# Altium PCB Адаптер_USB-DMX512.PcbDoc
Units mm, origin at the board's own origin, x right, y up, seen from the top; angles counter-clockwise.
Board outline 45 x 23 mm, 2 copper layers (Top Layer, Bottom Layer), stack 1.47 mm thick; 16 components, 16 nets, 75 pads, 9 vias.
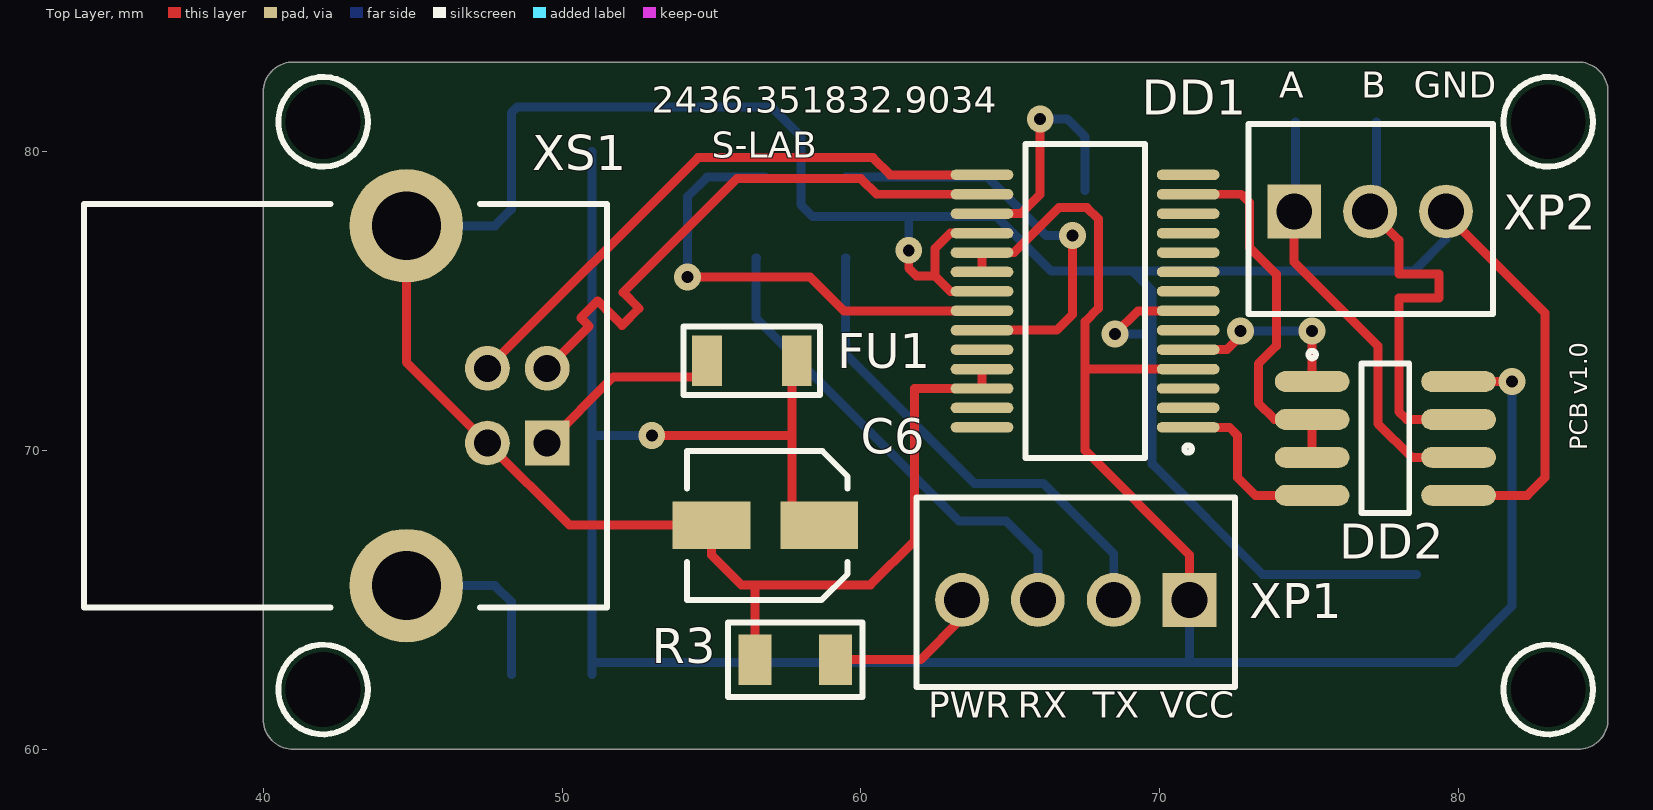
[diagram p0: Top Layer view]
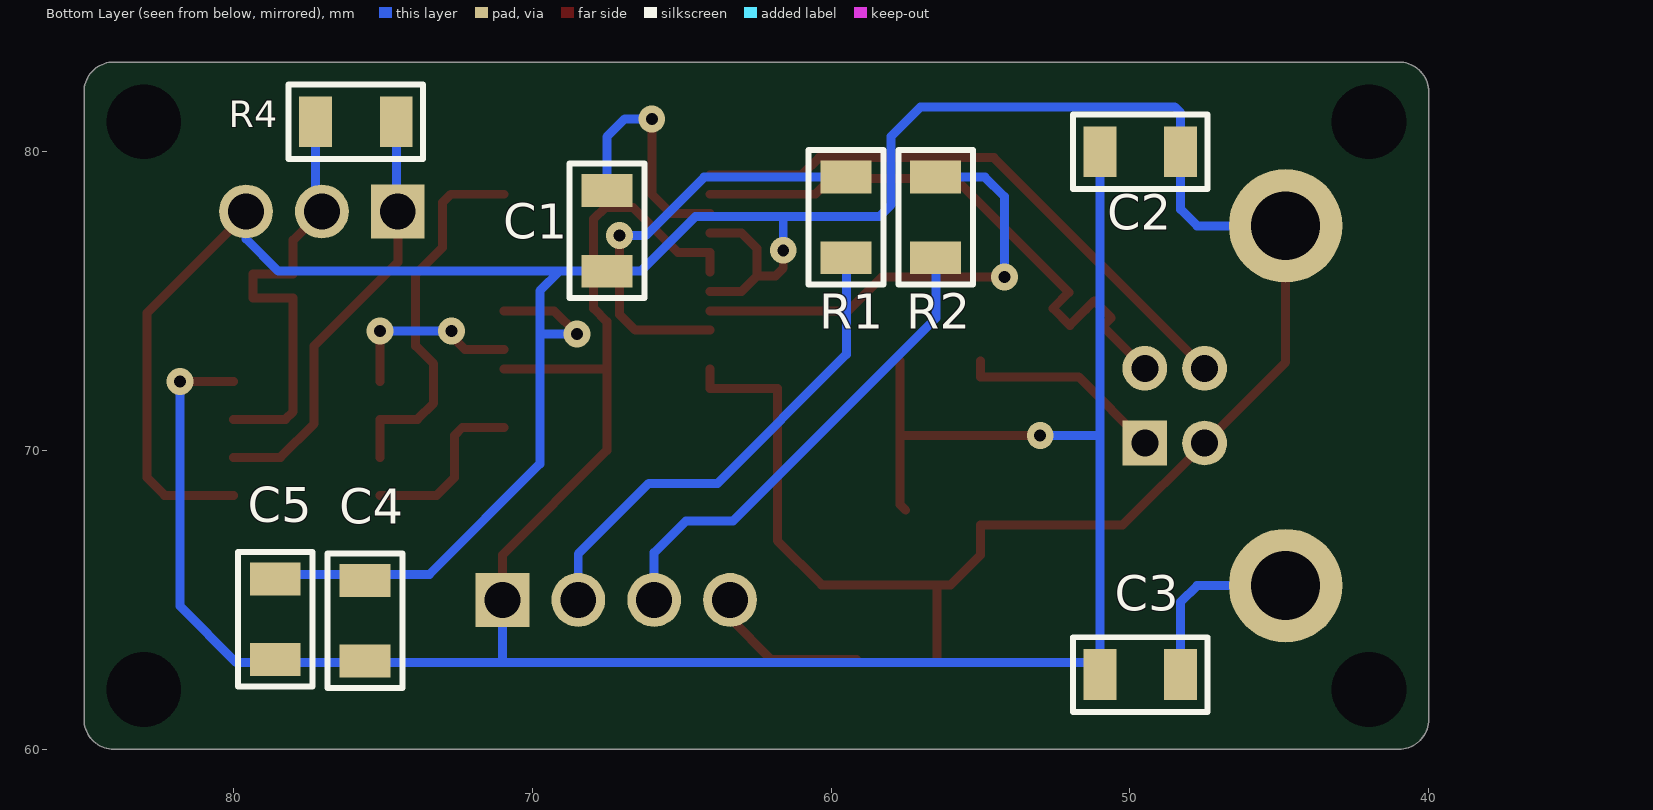
[diagram p1: Bottom Layer view, seen from below]
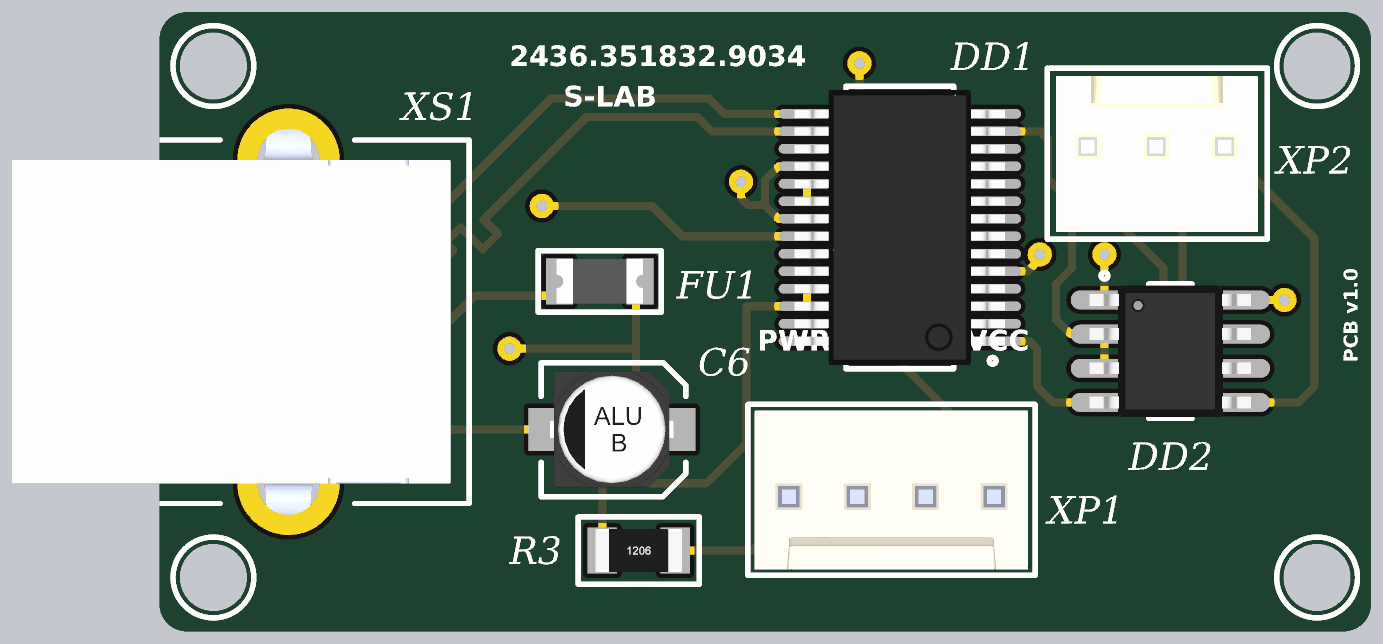
[diagram p2: 3D render of the assembled board from above, using the file's embedded part models]
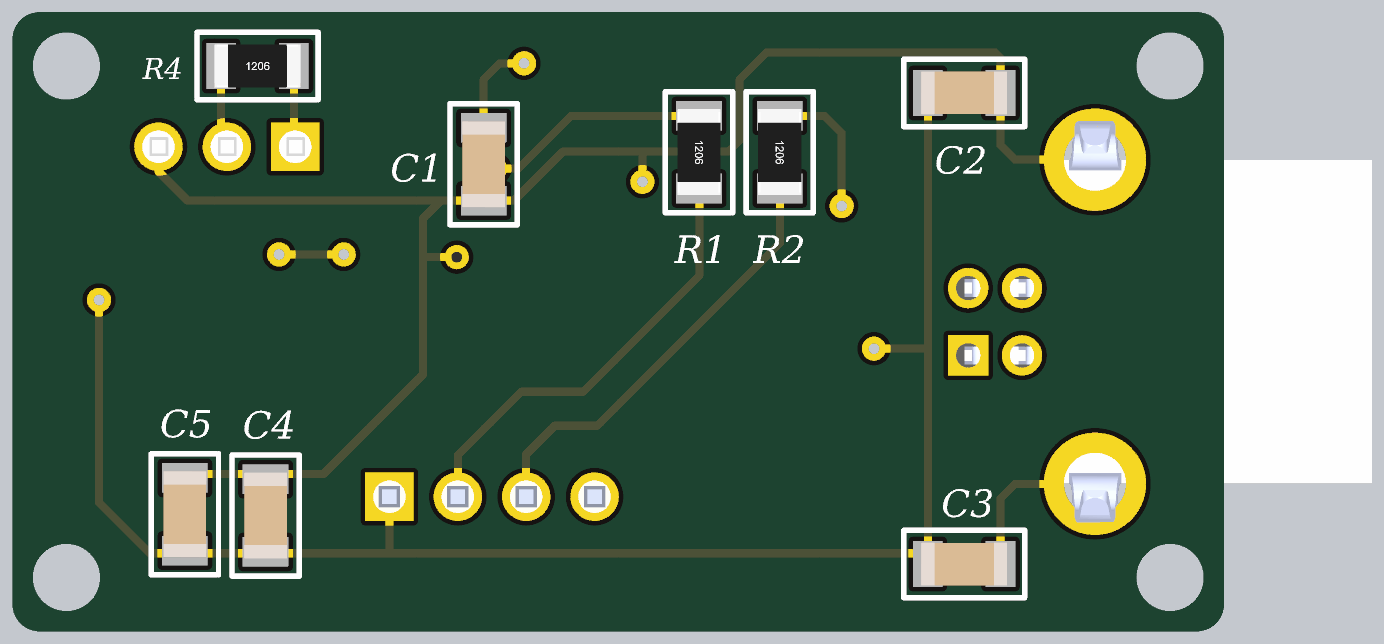
[diagram p3: 3D render of the assembled board from below, using the file's embedded part models]

## Layer stack, top to bottom
Top Solder: solder mask 0.015, Solder Resist, Dk 3.5
Top Layer: signal copper 0.035
Dielectric1: dielectric 1.4, FR-4, Dk 4.8
Bottom Layer: signal copper 0.035
Bottom Solder: solder mask 0.015, Solder Resist, Dk 3.5

## Board outline
40,61 40,82 cw(c41,82) 41,83 84,83 cw(c84,82) 85,82 85,61 cw(c84,61) 84,60 41,60 cw(c41,61)

## Design rules (kind name [scope] priority, off if disabled: settings)
AssemblyTestPointUsage [All] p1 off:
AssemblyTestpoint [All] p1 off: testpointundercomponent=TRUE minsize=1.016 maxsize=2.54 preferedsize=1.524 minholesize=0 maxholesize=1.016 preferedholesize=0.813 testpointgrid=0.025 usegrid=TRUE gridtolerance=0 allowsidetop=TRUE allowsidebottom=TRUE
Clearance Clearance_GND [InNet('GND')] p1: gap=0.15
Clearance Clearance_5V [InNet('+5V')] p2: gap=0.15
Clearance Clearance_Signal [All] p3: gap=0.1
ComponentClearance [All] p1 off: gap=0.2 collisioncheckmode=3 verticalgap=2540 showdistances=FALSE
DiffPairsRouting [All] p1 off: maxlimit=0.254 minlimit=0.254 mostfreqgap=0.254 toplayer_minwidth=0.381 toplayer_maxwidth=0.381 toplayer_prefwidth=0.381 bottomlayer_minwidth=0.381 bottomlayer_maxwidth=0.381 bottomlayer_prefwidth=0.381 maxuncoupledlength=12.7
FabricationTestPointUsage [All] p1 off: valid=0 allowmultiple=FALSE
FabricationTestpoint [All] p1 off: side=3 testpointundercomponent=TRUE minsize=1.016 maxsize=2.54 preferedsize=1.524 minholesize=0 maxholesize=1.016 preferedholesize=0.813 testpointgrid=0.025 allowsidetop=TRUE allowsidebottom=TRUE usegrid=TRUE gridtolerance=0
FanoutControl Fanout_BGA [IsBGA] p1 off: bgadir=Out bgaviamode=Centered fanoutstyle=Auto fanoutdirection=Alternating viagrid=0.025 // Fanout_BGA (Default Rule)
Height [All] p1 off: minheight=0 maxheight=25.4 prefheight=12.7
HoleSize [All] p1: absolutevalues=TRUE maxlimit=4 minlimit=0.2 maxpercent=80.000 minpercent=20.000
HoleToHoleClearance [All] p1: gap=0.2 allowstackedmicrovias=TRUE
MatchedLengths MatchedLengths_USB [InNetClass('USB')] p1: tolerance=1 checknetsindiffpair=FALSE checkdiffpairvsdiffpair=TRUE checkxsignals=TRUE checkothers=TRUE
MatchedLengths MatchedLengths_DMX [InNetClass('DMX')] p2: tolerance=1 checknetsindiffpair=FALSE checkdiffpairvsdiffpair=TRUE checkxsignals=TRUE checkothers=TRUE
MinimumSolderMaskSliver [All] p1: minsoldermaskwidth=0.1
NetAntennae [All] p1 off: netantennaetolerance=0
PasteMaskExpansion [All] p1 off: expansion=0
PlaneClearance [All] p1 off: clearance=0.508
PlaneConnect [All] p1 off: planeconnectstyle=Relief reliefexpansion=0.508 reliefentries=4 reliefconductorwidth=0.254 reliefairgap=0.254
PolygonConnect [All] p1 off: connectstyle=Relief reliefconductorwidth=0.254 reliefentries=4 polygonreliefangle="90 Angle" airgapwidth=0.254
RoutingCorners [All] p1: cornerstyle=45-Degree minsetback=0.3 maxsetback=0.3
RoutingVias [All] p1: holewidth=0.4 width=0.9 viastyle="Through Hole" minholewidth=0.4 minwidth=0.9 maxholewidth=0.4 maxwidth=0.9
ShortCircuit [All] p1: allowed=TRUE
SilkToSilkClearance [All] p1: silktosilkclearance=0.2
SilkToSolderMaskClearance [IsPad] p1: minsilkscreentomaskgap=0.2 clearancetoexposedcopper=TRUE
SolderMaskExpansion [All] p1: expansion=0.17
Width Width_5V [InNet('+5V')] p1: maxlimit=0.5 minlimit=0.15 preferedwidth=0.3
Width Width_GND [InNet('GND')] p2: maxlimit=0.5 minlimit=0.15 preferedwidth=0.3
Width Width_Signal [All] p3: maxlimit=0.3 minlimit=0.15 preferedwidth=0.3
11 further rules are at their usual default settings.

## Classes and differential pairs
net class "USB 2.0": NetDD1_15 NetDD1_16
net class "DMX 512": NetDD2_6 NetDD2_7
component class Коммутация: FU1 R1 R2 R3 R4 XP1 XP2 XS1
component class Преобразователь: C1 C2 C3 C4 C5 C6 DD1 DD2

## Components (designator, comment, footprint, x,y, rotation, side; value= is the part's Value field where it differs from the comment)
C1 "Cap 100n" C1206 67.5,77.35 r90 bottom
C2 "Cap 100n" C1206 49.65,80 r0 bottom
C3 "Cap 100n" C1206 49.65,62.5 r0 bottom
C4 "Cap 100n" C1206 75.6,64.3 r270 bottom
C5 "Cap 100n" C1206 78.6,64.35 r270 bottom
C6 "22u 16V" "Cap EL B" 56.8,67.5 r180 top
DD1 "FT232RL" SSOP28 67.5,75 r180 top
DD2 "MAX485CSA" SOIC8 77.55,70.405 r0 top
FU1 "MF-NSMF050_V" "F1206 Style1" 56.35,73 r0 top
R1 "Res 1k" R1206 59.5,77.8 r270 bottom
R2 "Res 1k" R1206 56.5,77.8 r270 bottom
R3 "Res 1k" R1206 57.8,63 r0 top
R4 "Res 120" R1206 75.9,81 r180 bottom
XP1 "WF-4" "WF-4 (DS1070-4M)" 71,65 r180 top
XP2 "WF-3" WF-3 74.5,78 r0 top
XS1 "USB B" USB-B 48.5,71.5 r180 top

## Footprints (in the part's own frame and the unit in brackets; to place one, negate y for a bottom-side part, rotate by r counter-clockwise, add the part's x,y. Pads: shape width x height; smd on the part's side, far side on the other; paste and mask are expansions set on the pad)
C1206 [mm]
  rect 1.1x1.7 smd: 1(-1.35,0) 2(1.35,0)
  silkscreen extent -2.25,-1.25 2.25,1.25, body extent -1.6,-0.8 1.6,0.8, height 0.79
"Cap EL B" [mm]
  rect 2.6x1.6 smd: 1(1.8,0) 2(-1.8,0)
  silkscreen extent -2.75,-2.48 2.63,2.5, body extent -2.3,-2.15 2.3,2.15, height 5.4
"F1206 Style1" [mm] "PTC Resettable Fuses"
  rect 1x1.7 smd: 1(-1.5,0) 2(1.5,0)
  silkscreen extent -2.29,-1.14 2.29,1.14, body extent -1.6,-0.83 1.6,0.83, height 1.48
R1206 [mm]
  rect 1.1x1.7 smd: 1(-1.35,0) 2(1.35,0)
  silkscreen extent -2.25,-1.25 2.25,1.25, body extent -1.6,-0.8 1.6,0.8, height 0.6
SOIC8 [mm]
  oval 2.5x0.7 smd: 1(-2.45,1.905) 2(-2.45,0.635) 3(-2.45,-0.635) 4(-2.45,-1.905) 5(2.45,-1.905) 6(2.45,-0.635) 7(2.45,0.635) 8(2.45,1.905)
  silkscreen extent -2.57,-2.5 0.8,2.93, body extent -3,-2.45 3,2.45, height 1.7
SSOP28 [mm]
  oval 2.1x0.35 smd: 1(-3.45,4.225) 2(-3.45,3.575) 3(-3.45,2.925) 4(-3.45,2.275) 5(-3.45,1.625) 6(-3.45,0.975) 7(-3.45,0.325) 8(-3.45,-0.325) 9(-3.45,-0.975) 10(-3.45,-1.625) 11(-3.45,-2.275) 12(-3.45,-2.925) 13(-3.45,-3.575) 14(-3.45,-4.225) 15(3.45,-4.225) 16(3.45,-3.575) 17(3.45,-2.925) 18(3.45,-2.275) 19(3.45,-1.625) 20(3.45,-0.975) 21(3.45,-0.325) 22(3.45,0.325) 23(3.45,0.975) 24(3.45,1.625) 25(3.45,2.275) 26(3.45,2.925) 27(3.45,3.575) 28(3.45,4.225)
  silkscreen extent -3.57,-5.25 2,5.25, body extent -3.91,-5.1 3.91,5.1, height 1.96
USB-B [mm] "Connector; USB1.1, Type B, Thru-Hole; 4 Position; Right Angle"
  rect 1.5x1.5 hole 0.9: 1(-1,1.25)
  round 1.5 hole 0.9: 2(-1,-1.25) 3(1,-1.25) 4(1,1.25)
  round 3.8 hole 2.3: MH1(3.71,6.02) MH1(3.71,-6.02)
  silkscreen extent -3,-6.75 14.5,6.75, body extent -2.31,-7.45 13.99,7.45, height 11
WF-3 [mm]
  rect 1.8x1.8 hole 1.2: 1(0,0)
  round 1.8 hole 1.2: 2(2.54,0) 3(5.08,0)
  silkscreen extent -1.52,-3.43 6.65,2.92, body extent -1.2,-3.17 6.3,2.62, height 11.62
"WF-4 (DS1070-4M)" [mm]
  rect 1.8x1.8 hole 1.2: 1(0,0)
  round 1.8 hole 1.2: 2(2.54,0) 3(5.08,0) 4(7.62,0)
  silkscreen extent -1.52,-3.43 9.14,2.92, body extent -1.27,-3.2 8.89,2.7, height 11.73

## Part data
DD1: "USB to UART Converter"
DD2: "HALF DUPLEX"
FU1: "13.2V 0.5A"
XP1 XP2: "Power Con (DS1070-4M)"
XS1: "Female B"

## Free pads (board coordinates)
  round 0 hole 2.5 unplated paste+0 mask+0: MH(42,62) MH(42,81) MH(83,62) MH(83,81)

## Via types
v1: diameter 0.9, hole 0.4, Top Layer to Bottom Layer, 9 vias

## Nets (pads, with @x,y where several pads share a name; then routed paths per layer and width w, separated by ;. In a path a pad name is that pad's centre, name@x,y a point inside that pad or via, vN(x,y) a via of type N, cw(c..) or ccw(c..) an arc to the next point about the centre after c; other vN are vias at no path point)
+5V: C2.2 C3.2 C4.2 C5.2 C6.2 DD1.4 DD1.19 DD1.20 DD2.8 FU1.2 XP1.1 | length 95.8
  Top Layer w0.3: v1(53,70.5) 57.7,70.5 ; C6.2@57.5,68 57.7,68.2 FU1.2@57.7,73 ; DD1.20 DD1.19 65.119,76.625 66.624,78.13 67.564,78.13 67.945,77.749 67.945,74.756 67.5,74.311 67.5,70 71,66.5 XP1.1 ; 67.5,72.725 DD1.4 ; DD2.8 v1(81.788,72.31)
  Bottom Layer w0.3: C2.2 51,70.5 ; v1(53,70.5) 51,70.5 ; 71,62.9 XP1.1 ; v1(81.788,72.31) 81.788,64.788 79.9,62.9 51,62.9 C3.2 51,70.5
GND: C1.1 C2.1 C3.1 C4.1 C5.1 C6.1 DD1.7 DD1.18 DD1.21 DD1.25 DD1.26 DD2.5 R3.1 XP2.3 XS1.4 XS1.MH1 | length 127.5
  Top Layer w0.3: XS1.MH1@44.79,77.52 44.79,72.96 XS1.4 50.25,67.5 C6.1 55,66.5 56,65.5 60.318,65.5 61.8,66.982 61.8,72.075 DD1.26 DD1.25 ; R3.1 56.45,65.45 ; v1(61.6,76.7) 61.6,76.1 61.867,75.833 62.484,75.833 ; DD1.21 62.992,75.325 62.484,75.833 ; DD1.18 62.992,77.275 62.484,76.767 62.484,75.833 ; v1(68.5,73.9) 69.275,74.675 DD1.7 ; XP2.3@79.54,77.96 82.9,74.6 82.9,69.1 82.3,68.5 DD2.5
  Bottom Layer w0.3: XS1.MH1@44.79,65.48 47.752,65.48 48.3,64.932 C3.1 ; XS1.MH1@44.79,77.52 47.752,77.52 48.3,78.068 C2.1 48.3,81.3 48.5,81.5 57,81.5 57.988,80.512 57.988,78.232 58.395,77.826 64.545,77.826 66.37,76 C1.1 69.088,76 ; v1(61.6,76.7) 61.6,77.826 ; v1(68.5,73.9) 69.748,73.9 ; 73.439,65.85 C5.1@78.6,65.85 ; 73.439,65.861 69.748,69.552 69.748,75.34 69.088,76 ; XP2.3 79.58,77.08 78.5,76 69.088,76
NetC1_2: C1.2 DD1.17 | length 8.3
  Top Layer w0.3: DD1.17 65.352,77.925 66,78.573 v1(66,81.1)
  Bottom Layer w0.3: v1(66,81.1) 66.9,81.1 67.5,80.5 C1.2
NetDD1_1: DD1.1 DD2.4 | length 5.9
  Top Layer w0.3: DD1.1 72.334,70.775 72.6,70.51 72.6,69.1 73.2,68.5 DD2.4
NetDD1_5: DD1.5 DD2.1 | length 6.2
  Top Layer w0.3: DD1.5 72.25,73.375 72.7,73.825 v1(72.7,74) ; DD2.1 v1(75.1,74)
  Bottom Layer w0.3: v1(72.7,74) v1(75.1,74)
NetDD1_15: DD1.15 XS1.3 | length 19.7
  Top Layer w0.3: XS1.3 54.55,79.8 60.4,79.8 60.975,79.225 DD1.15
NetDD1_16: DD1.16 XS1.2 | length 19.7
  Top Layer w0.3: XS1.2 50.625,73.875 50.908,74.158 50.624,74.441 51.19,75.007 51.474,74.724 52.007,74.19 52.573,74.756 52.039,75.289 52.4,75.65 55.85,79.1 60,79.1 60.525,78.575 DD1.16
NetDD1_22: DD1.22 R2.1 | length 15.9
  Top Layer w0.3: v1(54.2,75.8) 58.3,75.8 59.425,74.675 DD1.22
  Bottom Layer w0.3: v1(54.2,75.8) 54.2,78.5 54.85,79.15 R2.1@56.794,79.15
NetDD1_23: DD1.23 R1.1 | length 14.3
  Top Layer w0.3: DD1.23 66.548,74.025 67.081,74.558 v1(67.081,77.191)
  Bottom Layer w0.3: R1.1 64.25,79.15 66.209,77.191 v1(67.081,77.191)
NetDD2_6: DD2.6 R4.2 XP2.1 | length 14.4
  Top Layer w0.3: XP2.1 74.5,76.3 77.3,73.5 77.3,70.9 78.43,69.77 DD2.6
  Bottom Layer w0.3: XP2.1@74.55,78.05 R4.2
NetDD2_7: DD2.7 R4.1 XP2.2 | length 14.7
  Top Layer w0.3: XP2.2 78,77.04 78,76.3 78,75.9 79.346,75.9 79.346,75.1 78,75.1 78,75 78,71.3 78.26,71.04 DD2.7
  Bottom Layer w0.3: XP2.2@77.25,78.21 R4.1
NetFU1_1: FU1.1 XS1.1 | length 7
  Top Layer w0.3: XS1.1 51.716,72.466 55,72.466 FU1.1@55,73
NetR1_2: R1.2 XP1.2 | length 16.5
  Bottom Layer w0.3: R1.2 59.487,76.45 59.487,73.213 63.8,68.9 66.1,68.9 68.46,66.54 XP1.2
NetR2_2: R2.2 XP1.3 | length 16.3
  Bottom Layer w0.3: R2.2 56.49,76.45 56.49,74.43 63.282,67.638 64.862,67.638 65.92,66.58 XP1.3
NetR3_2: R3.2 XP1.4 | length 5.4
  Top Layer w0.3: R3.2 62,63 63.38,64.38 XP1.4
SEL: DD1.13 DD2.2 DD2.3 | length 12.8
  Top Layer w0.3: DD1.13 72.725,78.575 73,78.3 73,76.8 73.9,75.9 73.9,73.5 73.3,72.9 73.3,71.585 73.845,71.04 DD2.2 DD2.3
pads on no net: DD1.2 DD1.3 DD1.6 DD1.8 DD1.9 DD1.10 DD1.11 DD1.12 DD1.14 DD1.24 DD1.27 DD1.28

## Silkscreen, mask and mechanical layers (free items; w line width, h text height)
Top Overlay:
  circle w0.2: c83,81 r1.5
  circle w0.2: c83,62 r1.5
  circle w0.2: c42,62 r1.5
  circle w0.2: c42,81 r1.5
  text "A" at 74,81.5 h1.5
  text "B" at 76.75,81.5 h1.5
  text "GND" at 78.5,81.5 h1.5
  text "2436.351832.9034" at 53,81 h1.5
  text "S-LAB" at 55,79.5 h1.5
  text "PCB v1.0" at 84.5,70 h1 r90
  text "PWR" at 62.25,60.75 h1.5
  text "RX" at 65.25,60.75 h1.5
  text "TX" at 67.75,60.75 h1.5
  text "VCC" at 70,60.75 h1.5
M11 Board Outline:
  the board outline again, w0.2